# Altium PCB Falcon.PcbDoc
Units mm, origin at the board's own origin, x right, y up, seen from the top; angles counter-clockwise.
Board outline 152.4 x 101.6 mm, 2 copper layers (Top Layer, Bottom Layer); 40 components, 34 nets, 112 pads, 0 vias.
Unrouted connection lines stored in the file: 70.
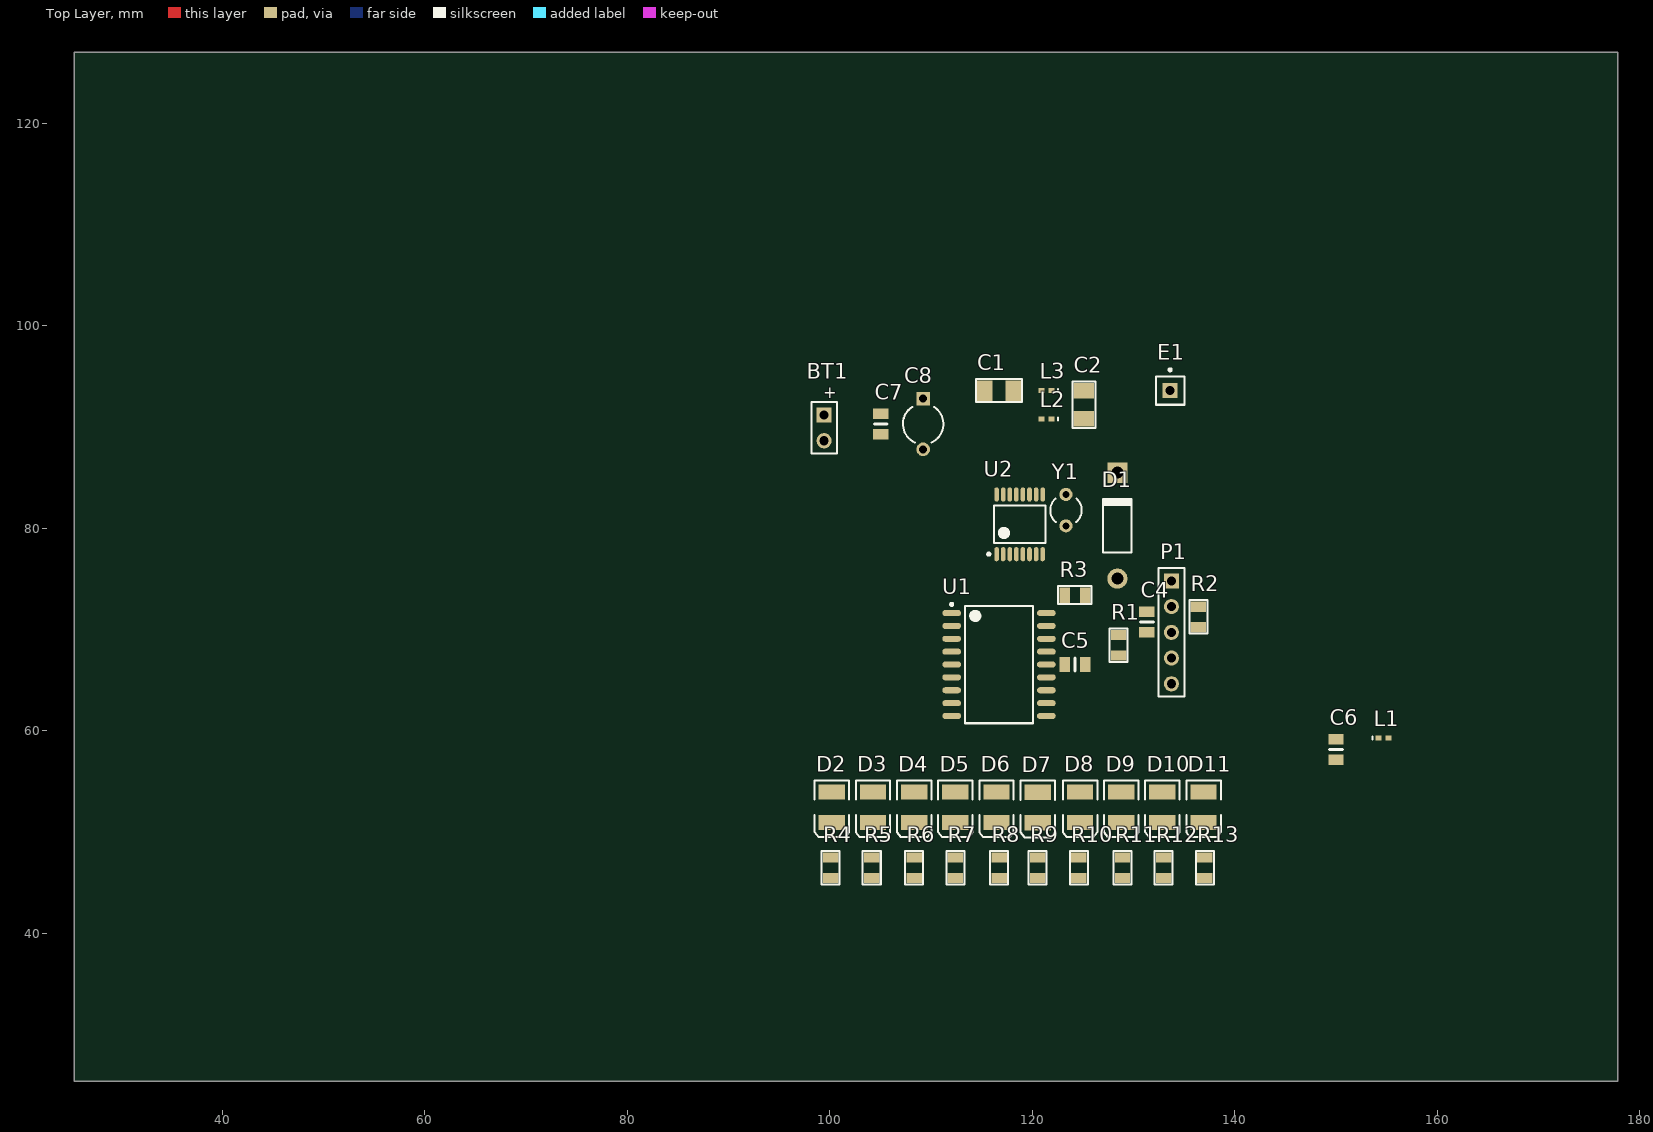
[diagram p0: Top Layer view]
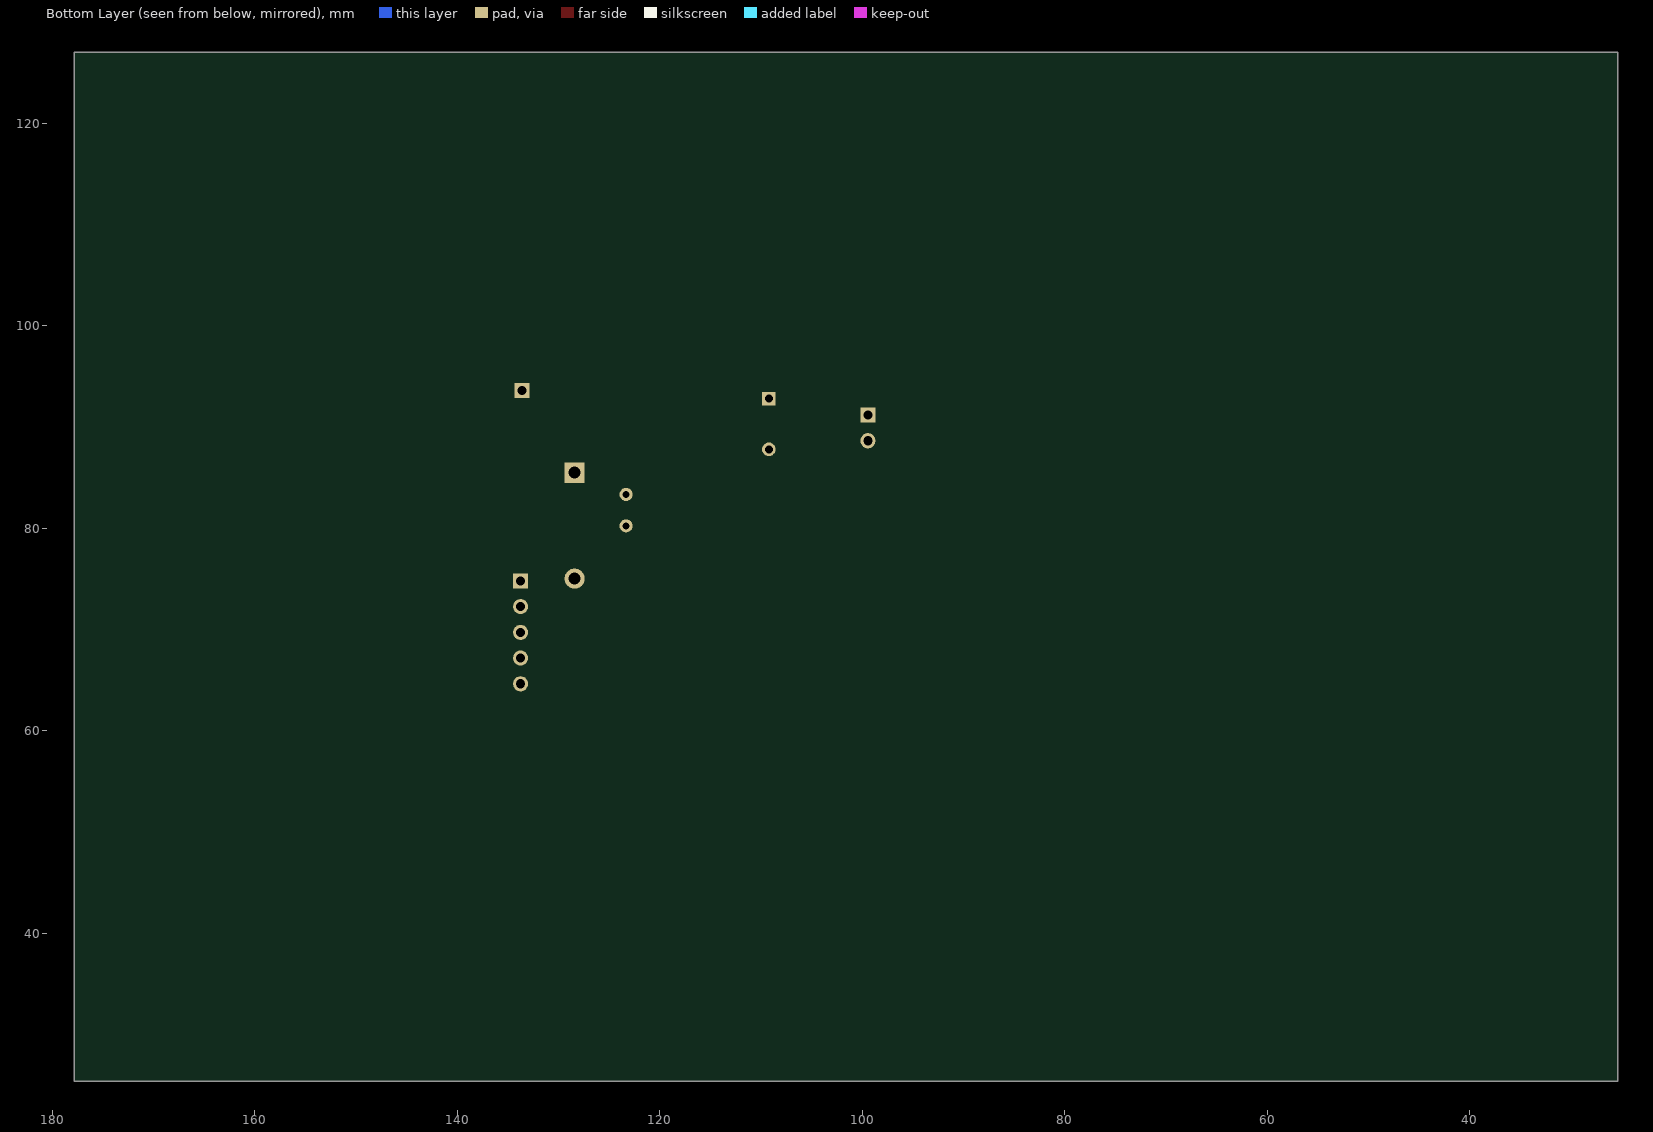
[diagram p1: Bottom Layer view, seen from below]

## Layer stack, top to bottom
Top Solder: solder mask 0.0102, Solder Resist, Dk 3.5
Top Layer: signal copper 0.0356
Dielectric 1: dielectric 0.32, FR-4, Dk 4.8
Bottom Layer: signal copper 0.0356
Bottom Solder: solder mask 0.0102, Solder Resist, Dk 3.5

## Board outline
25.4,25.4 177.8,25.4 177.8,127 25.4,127

## Design rules (kind name [scope] priority, off if disabled: settings)
Clearance [All] p1: gap=0.1
DiffPairsRouting [OnLayer('Top Layer')] p1: maxlimit=0.354 minlimit=0.254 mostfreqgap=0.354 toplayer_mingap=0.354 toplayer_minwidth=0.481 toplayer_maxwidth=0.481 toplayer_prefwidth=0.481 bottomlayer_maxgap=0.254 bottomlayer_prefgap=0.254 bottomlayer_minwidth=0.381 bottomlayer_maxwidth=0.381 bottomlayer_prefwidth=0.381 maxuncoupledlength=12.7
PolygonConnect [All] p1: connectstyle=Relief reliefconductorwidth=0.254 reliefentries=4 polygonreliefangle="90 Angle" airgapwidth=0.254
RoutingLayers [All] p1: top layer_v5=TRUE bottom layer_v5=FALSE
RoutingVias [All] p1: holewidth=0.711 width=1.27 viastyle="Through Hole" minholewidth=0.711 minwidth=1.27 maxholewidth=0.711 maxwidth=1.27
SolderMaskExpansion [All] p1: expansion=0.102
Width [All] p1: maxlimit=0.5 minlimit=0.5 preferedwidth=0.5
28 further rules are at their usual default settings.

## Components (designator, comment, footprint, x,y, rotation, side; value= is the part's Value field where it differs from the comment)
BT1 "Battery" BAT-2 99.441,89.916 r270 top
C1 "4.7pF" SMD-1206C 116.713,93.599 r90 top
C2 "4.7pF" SMD-1206C 125.095,92.202 r180 top
C4 "0.1uF" SMD-0805C 131.318,70.739 r180 top
C5 "0.1uF" SMD-0805C 124.206,66.548 r90 top
C6 "0.1uF" SMD-0805C 149.987,58.166 r0 top
C7 "0.1uF" SMD-0805C 105.029,90.297 r0 top
C8 "Cap2" CAPR5-4X5 109.22,90.297 r270 top
D1 "Diode 1N4001" DO-41 128.397,80.264 r90 top
D2 "LED1" 3.5X2.8X1.9 100.203,52.451 r270 top
D3 "LED2" 3.5X2.8X1.9 104.267,52.451 r270 top
D4 "LED3" 3.5X2.8X1.9 108.331,52.451 r270 top
D5 "LED4" 3.5X2.8X1.9 112.395,52.451 r270 top
D6 "LED5" 3.5X2.8X1.9 116.459,52.451 r270 top
D7 "LED6" 3.5X2.8X1.9 120.523,52.427 r270 top
D8 "LED7" 3.5X2.8X1.9 124.714,52.451 r270 top
D9 "LED8" 3.5X2.8X1.9 128.778,52.451 r270 top
D10 "LED9" 3.5X2.8X1.9 132.842,52.451 r270 top
D11 "LED10" 3.5X2.8X1.9 136.906,52.451 r270 top
E1 "Antenna" PIN1 133.604,93.599 r0 top
L1 "Inductor" 0402-A 154.686,59.309 r0 top
L2 "Inductor" 0402-A 121.412,90.805 r180 top
L3 "Inductor" 0402-A 121.412,93.599 r180 top
P1 "Header 5" HDR1X5 133.731,74.803 r270 top
R1 "10k" SMD-0805-RES 128.524,68.453 r0 top
R2 "10k" SMD-0805-RES 136.398,71.247 r180 top
R3 "1k" SMD-0805-RES 124.206,73.406 r90 top
R4 "560" SMD-0805-RES 100.076,46.482 r180 top
R5 "560" SMD-0805-RES 104.14,46.482 r180 top
R6 "560" SMD-0805-RES 108.331,46.482 r180 top
R7 "560" SMD-0805-RES 112.395,46.482 r180 top
R8 "560" SMD-0805-RES 116.713,46.482 r180 top
R9 "560" SMD-0805-RES 120.523,46.482 r180 top
R10 "560" SMD-0805-RES 124.587,46.482 r180 top
R11 "560" SMD-0805-RES 128.905,46.482 r180 top
R12 "560" SMD-0805-RES 132.969,46.482 r180 top
R13 "560" SMD-0805-RES 137.033,46.482 r180 top
U1 "PIC16F627A" PIC16F627A 116.713,66.548 r0 top
U2 "MRF49XA" MRF49XA 118.745,80.391 r90 top
Y1 "10MGz" R38 123.317,81.788 r0 top

## Footprints (in the part's own frame and the unit in brackets; to place one, negate y for a bottom-side part, rotate by r counter-clockwise, add the part's x,y. Pads: shape width x height; smd on the part's side, far side on the other; paste and mask are expansions set on the pad)
3.5X2.8X1.9 [mm] "SM LED; 2 C-Bend Leads; Body 3.5 x 2.8 x 1.9 mm, inc leads (LxWxH typ)"
  rect 1.5x2.6 smd: 1(-1.5,0) 2(1.5,0)
  silkscreen extent -2.65,-1.7 2.95,1.7
0402-A [mm] "Chip Inductor, Body 1.0x0.5mm, IPC High Density"
  rect 0.6x0.5 smd: 1(-0.5,0) 2(0.5,0)
  silkscreen extent -1.1,-0.15 -1.1,0.15, body extent -0.55,-0.3 0.55,0.3, height 0.55
BAT-2 [mm] "Battery; 2 Leads"
  rect 1.5x1.5 hole 0.9: 1(-1.27,0)
  round 1.5 hole 0.9: 2(1.27,0)
  silkscreen extent -2.54,-1.27 2.54,1.27
CAPR5-4X5 [mm] "Capacitor; 2 Leads"
  rect 1.35x1.35 hole 0.8: 1(-2.5,0)
  round 1.35 hole 0.8: 2(2.5,0)
  silkscreen extent -1.69,-2 1.82,2
DO-41 [mm] "Diode, Axial; Body 5.2 x 2.7 mm (LxDia. max), Lead Dia. 0.86 mm (max)"
  round 2 hole 1.2: 1(-5.23,0)
  rect 2x2 hole 1.2: 2(5.23,0)
  silkscreen extent -2.65,-1.4 2.75,1.4
HDR1X5 [mm] "Connector; Header; 5 Position"
  rect 1.5x1.5 hole 0.9: 1(0,0)
  round 1.5 hole 0.9: 2(2.54,0) 3(5.08,0) 4(7.62,0) 5(10.16,0)
  silkscreen extent -1.27,-1.27 11.43,1.27
MRF49XA [mm]
  oval 1.4x0.45 smd: 1(-2.95,2.275) 2(-2.95,1.625) 3(-2.95,0.975) 4(-2.95,0.325) 5(-2.95,-0.325) 6(-2.95,-0.975) 7(-2.95,-1.625) 8(-2.95,-2.275) 9(2.95,-2.275) 10(2.95,-1.625) 11(2.95,-0.975) 12(2.95,-0.325) 13(2.95,0.325) 14(2.95,0.975) 15(2.95,1.625) 16(2.95,2.275)
  silkscreen extent -3.07,-2.55 1.85,3.17, body extent -2.25,-2.55 2.25,2.55, height 1.2
PIC16F627A [mm]
  oval 1.85x0.6 smd: 1(-4.675,5.08) 2(-4.675,3.81) 3(-4.675,2.54) 4(-4.675,1.27) 5(-4.675,0) 6(-4.675,-1.27) 7(-4.675,-2.54) 8(-4.675,-3.81) 9(-4.675,-5.08) 10(4.675,-5.08) 11(4.675,-3.81) 12(4.675,-2.54) 13(4.675,-1.27) 14(4.675,0) 15(4.675,1.27) 16(4.675,2.54) 17(4.675,3.81) 18(4.675,5.08)
  silkscreen extent -4.8,-5.8 3.35,6.05, body extent -3.75,-5.8 3.75,5.8, height 2.05
PIN1 [mm] "Generic Antenna; 1 Lead"
  rect 1.5x1.5 hole 0.9: 1(0,0)
  silkscreen extent -1.4,-1.4 1.4,2.17
R38 [mm] "Crystal, Thru-Hole; 2 Leads; Body 3.1 x 8.2 mm (Dia.xH)"
  round 1.3 hole 0.7: 1(0,1.55) 2(0,-1.55)
  silkscreen extent -1.55,-1.19 1.55,1.17
SMD-0805-RES [mil]
  rect 60x40 smd: 1(0,40) 2(0,-40)
  silkscreen extent -35,-65 35,65, body extent -24,-39 26,39, height 31
SMD-0805C [mil]
  rect 60x40 smd: 1(0,40) 2(0,-40)
  silkscreen extent -25,0 25,0, body extent -25,-39 25,39, height 35
SMD-1206C [mil]
  rect 80x60 smd: 1(0,55) 2(0,-55)
  silkscreen extent -45,-90 45,90, body extent -31,-63 32,63, height 39

## Part data
BT1: "Multicell Battery"
C1 C2: library part GC331AD72E333KX01D, "CAP CER 0.033UF 250V X7T 1206"
C4 C5 C6 C7: library part GC321AD72E103KX01D, "CAP CER 10000PF 250V X7T 0805"
C8: "Capacitor"
D1: "1 Amp General Purpose Rectifier"
D2 D3 D5 D6 D7 D8 D9 D10 D11: library part LED3, "Typical BLUE SiC LED"
D4: "Typical BLUE SiC LED"
E1: "Generic Antenna"
P1: "Header, 5-Pin"
R1 R2 R3 R4 R5 R6 R7 R8 R9 R10 R11 R12 R13: library part ERJ-6BQF1R0V, "RES SMD 1 OHM 1% 1/3W 0805"
Y1: library part XTAL, "Crystal Oscillator"

## Nets (pads, with @x,y where several pads share a name; then routed paths per layer and width w, separated by ;. In a path a pad name is that pad's centre, name@x,y a point inside that pad or via, vN(x,y) a via of type N, cw(c..) or ccw(c..) an arc to the next point about the centre after c; other vN are vias at no path point)
CS: U1.17 U2.3
FSK: U1.18 U2.6
GND: BT1.2 C4.1 C5.2 C6.2 C7.2 C8.2 P1.3 R4.1 R5.1 R6.1 R7.1 R8.1 R9.1 R10.1 R11.1 R12.1 R13.1 U1.5 U2.11 Y1.2
"MCLR VPP": D1.2 P1.1 R3.2 U1.4
NetC1_2: C1.2 L1.1 L2.2 L3.2 U2.13
NetC2_1: C2.1 L2.1 U2.12
NetC2_2: C2.2 L3.1
NetC3_2: E1.1
NetC4_2: C4.2 D1.1 R1.1
NetD2_1: D2.1 U1.6
NetD2_2: D2.2 R4.2
NetD3_1: D3.1 U1.7
NetD3_2: D3.2 R5.2
NetD4_1: D4.1 U1.8
NetD4_2: D4.2 R6.2
NetD5_1: D5.1 U1.9
NetD5_2: D5.2 R7.2
NetD6_1: D6.1 U1.10
NetD6_2: D6.2 R8.2
NetD7_1: D7.1 U1.11
NetD7_2: D7.2 R9.2
NetD8_2: D8.2 R10.2
NetD9_2: D9.2 R11.2
NetD10_1: D10.1 U1.15
NetD10_2: D10.2 R12.2
NetD11_1: D11.1 U1.16
NetD11_2: D11.2 R13.2
NetP1_2: P1.2 R2.2
NetU2_9: U2.9 Y1.1
RB6: D8.1 P1.5 U1.12
RB7: D9.1 P1.4 U1.13
SCK: U1.2 U2.2
SDI: U1.1 U2.1
VCC: BT1.1 C1.1 C5.1 C6.1 C7.1 C8.1 L1.2 R1.2 R2.1 R3.1 U1.14 U2.14
pads on no net: U1.3 U2.4 U2.5 U2.7 U2.8 U2.10 U2.15 U2.16

## Text inside footprints (layer, text, board x,y; h text height)
BT1: Top Overlay "+" at 100.711,93.853 h1.15 r180